# Altium PCB WEB_RAD_PWR.PcbDoc
Units mm, origin at the board's own origin, x right, y up, seen from the top; angles counter-clockwise.
Board outline 47.5 x 34 mm, 2 copper layers (Top Layer, Bottom Layer), stack 1.62 mm thick; 9 components, 6 nets, 37 pads, 28 vias.
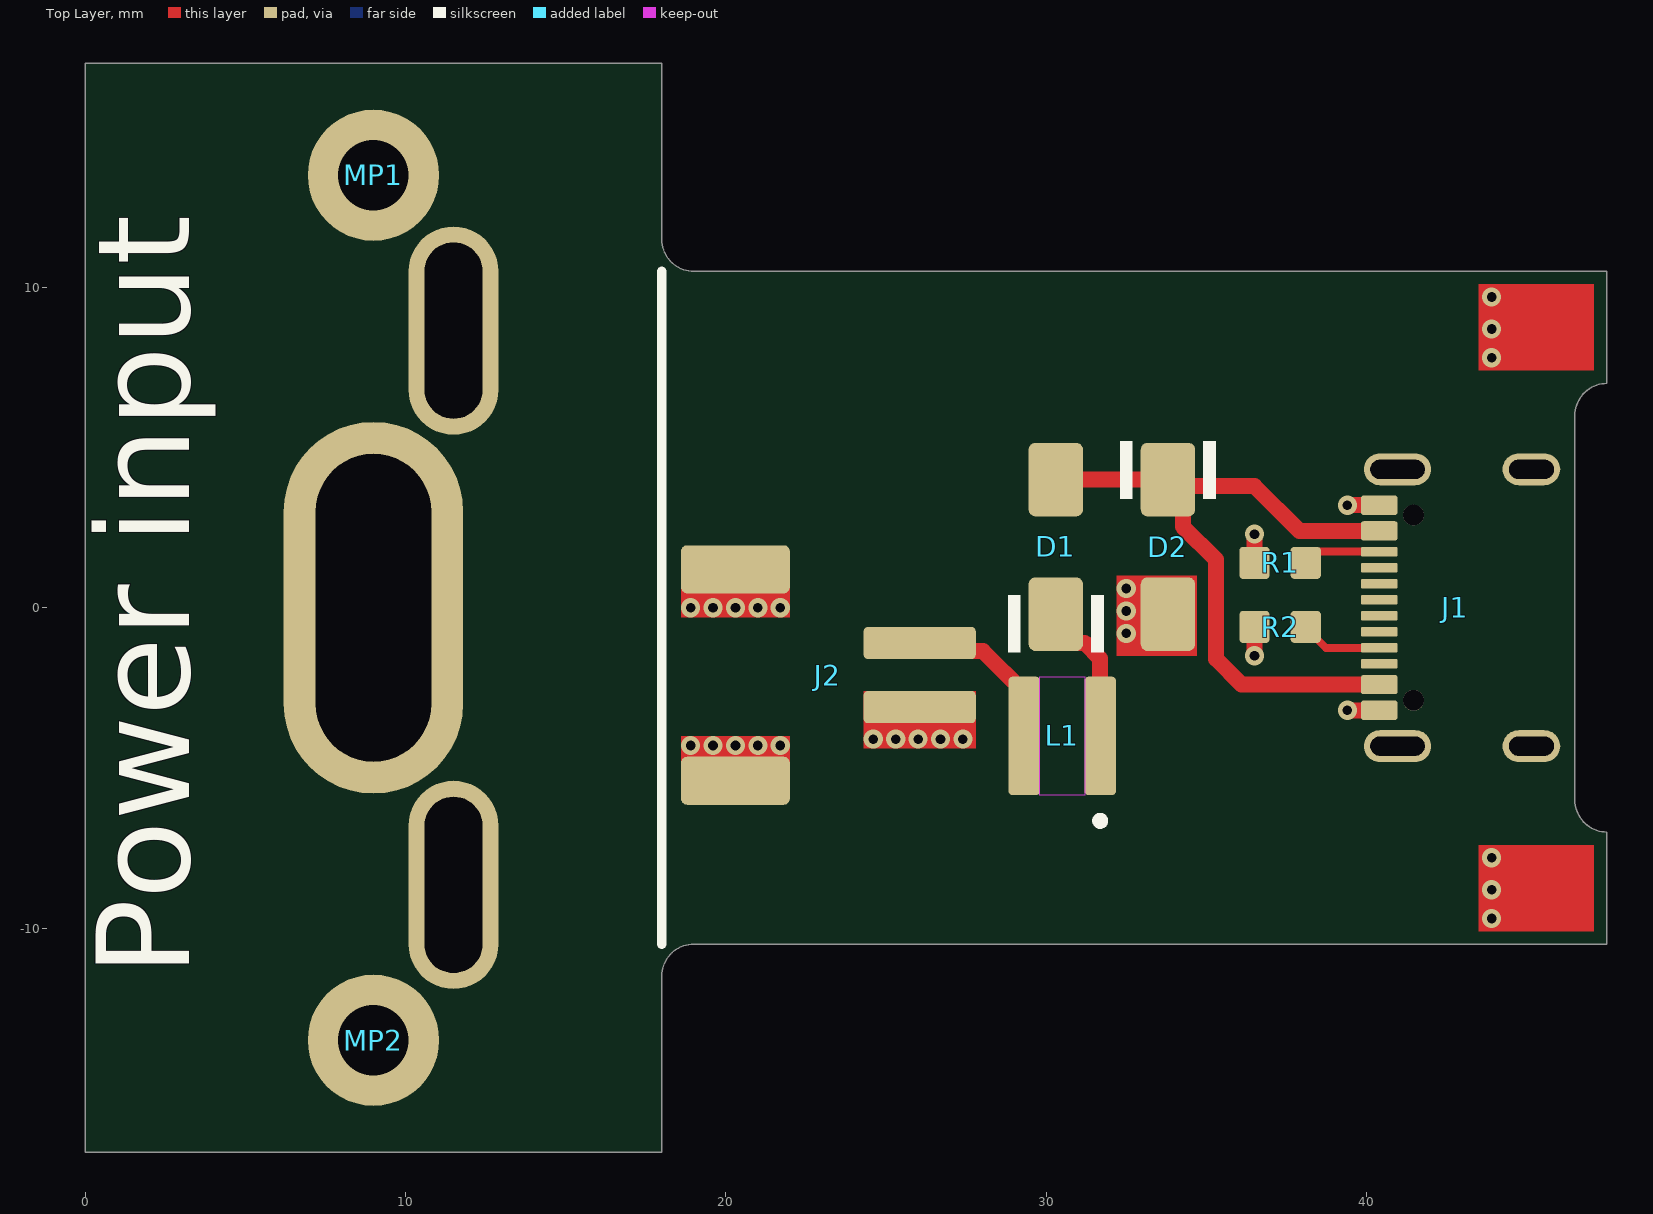
[diagram p0: Top Layer view]
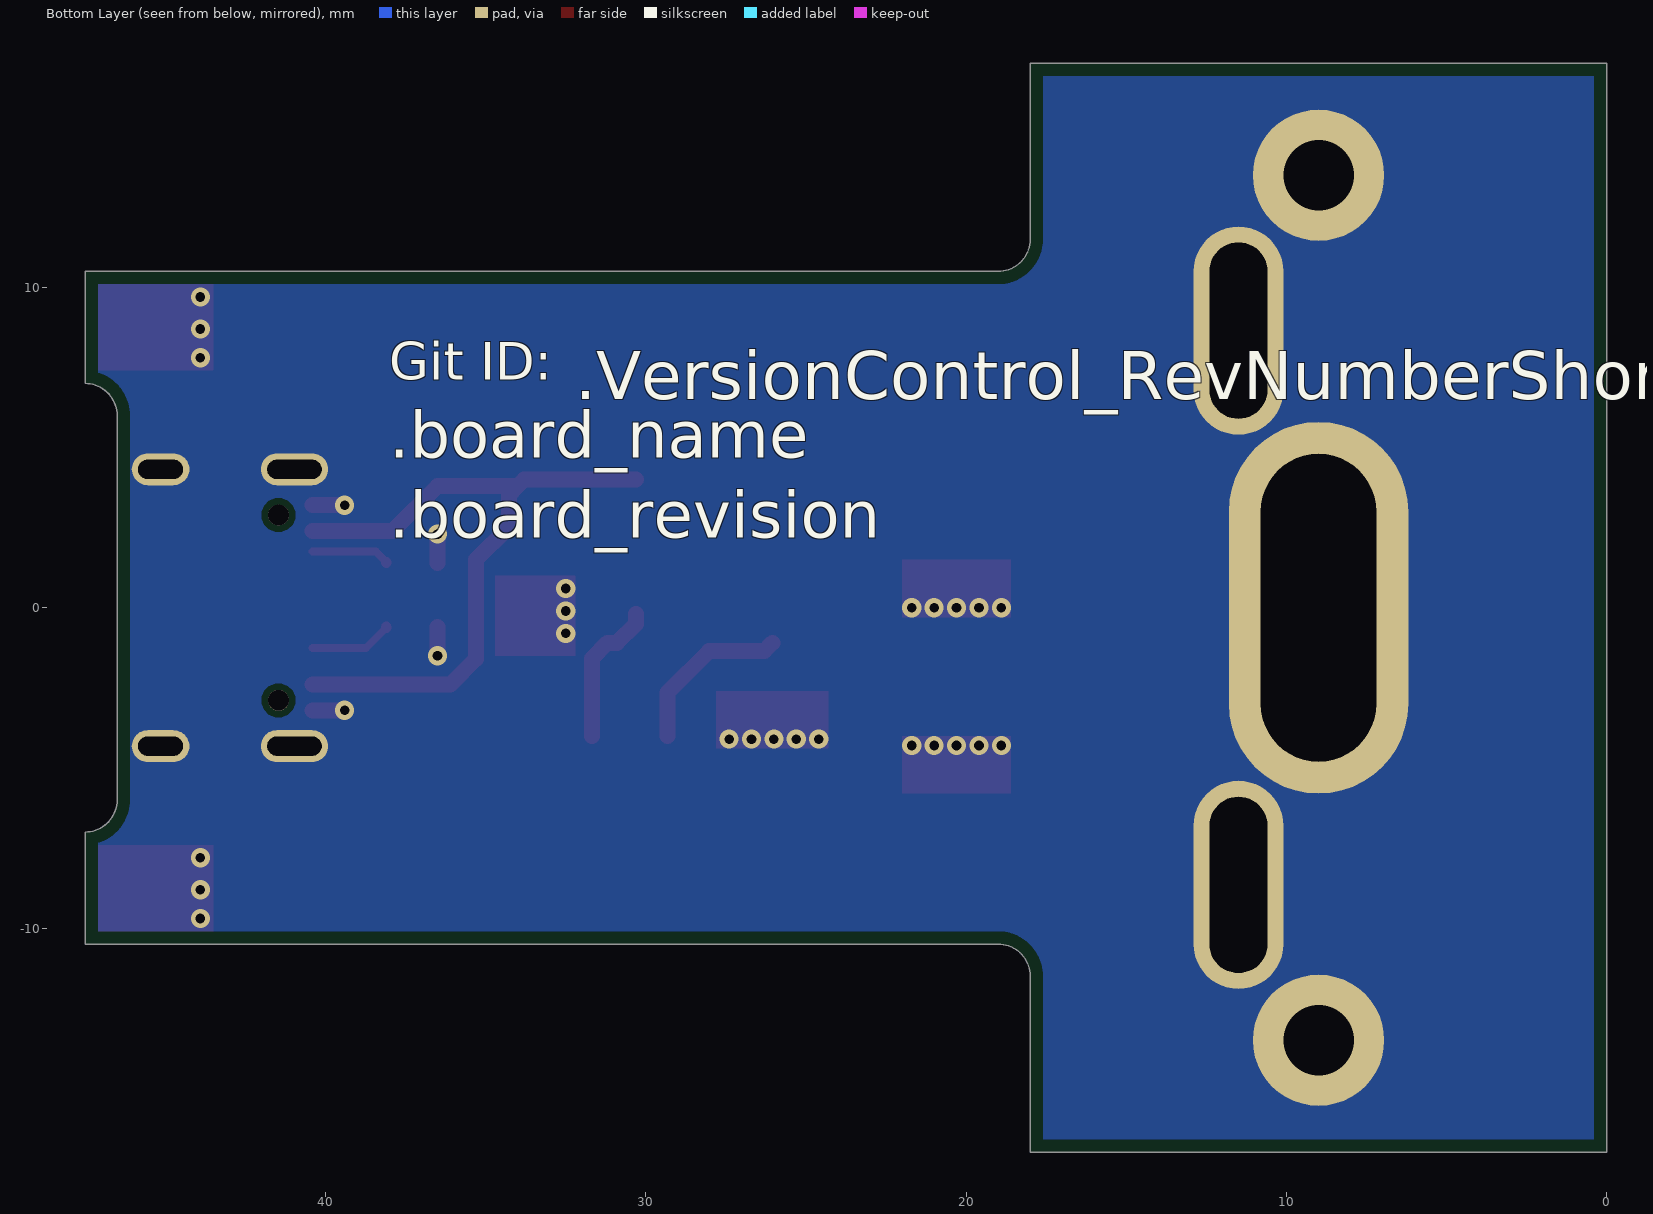
[diagram p1: Bottom Layer view, seen from below]
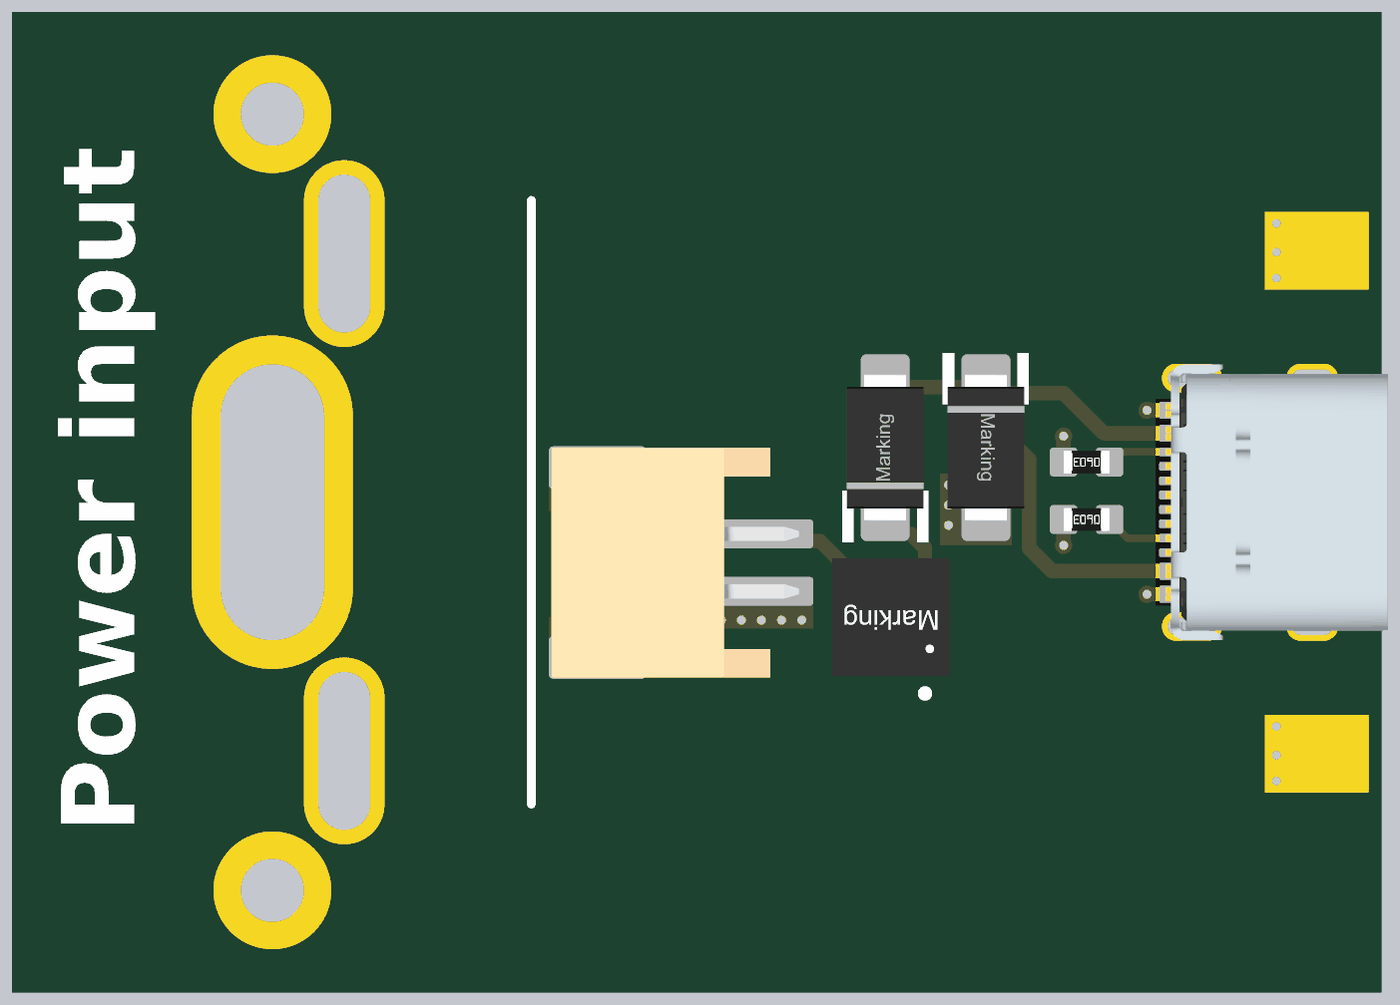
[diagram p2: 3D render of the assembled board from above, using the file's embedded part models]

## Layer stack, top to bottom
Top Solder: solder mask 0.0254, SM-001, Dk 4
Top Layer: signal copper 0.035
Dielectric 3: core 1.55, Core-042, Dk 4.6
Bottom Layer: signal copper 0.035
Bottom Solder: solder mask 0.0254, SM-001, Dk 4

## Board outline
0,-17 0,17 18,17 18,11.5 ccw(c19,11.5) 19,10.5 47.5,10.5 47.5,7 ccw(c47.5,6) 46.5,6 46.5,-6 ccw(c47.5,-6) 47.5,-7 47.5,-10.5 19,-10.5 ccw(c19,-11.5) 18,-11.5 18,-17

## Design rules (kind name [scope] priority, off if disabled: settings)
BoardOutlineClearance [IsElectrical or IsPoly] p1: gap=0.4 ignorepadtopadclearanceinfootprint=FALSE
Clearance Clearance_NTPH_to_Track [IsTrack vs IsPad and IsThruPin and not PadIsPlated] p1: gap=0.254 ignorepadtopadclearanceinfootprint=TRUE
Clearance Clearance_TH_Pad_to_TH_Pad [IsPad and IsThruPin vs IsPad and IsThruPin] p2: gap=0.5 ignorepadtopadclearanceinfootprint=TRUE
Clearance Clearance_SMT_Pad_to_SMT_Pad [IsPad and IsSMTPin vs IsPad and IsSMTPin] p3: gap=0.127 ignorepadtopadclearanceinfootprint=TRUE
Clearance [All] p4: gap=0.2 ignorepadtopadclearanceinfootprint=FALSE except(0.127: SMDPad-SMDPad)
DiffPairsRouting DiffpairThermal [InDifferentialPair('K1') or InDifferentialPair('K2')] p1: maxlimit=0.254 minlimit=0.254 mostfreqgap=0.254 toplayer_minwidth=0.381 toplayer_maxwidth=0.381 toplayer_prefwidth=0.381 bottomlayer_minwidth=0.381 bottomlayer_maxwidth=0.381 bottomlayer_prefwidth=0.381 maxuncoupledlength=12.7
DiffPairsRouting USB_ext_layer_JLCPCB_4layer_7628 [InDifferentialPair('USB')] p2: maxlimit=0.35 minlimit=0.35 mostfreqgap=0.35 toplayer_minwidth=0.33 toplayer_maxwidth=0.33 toplayer_prefwidth=0.33 bottomlayer_minwidth=0.33 bottomlayer_maxwidth=0.33 bottomlayer_prefwidth=0.33 maxuncoupledlength=12.7
Height [not HasFootprint('PEC11R-4215F-S0024') and not HasFootprint('WS-TASV_L6W6H9.5_4301x20958x6') and ontop] p1: minheight=0 maxheight=6.5 prefheight=1
HoleSize NPTH_HoleSize [IsPad And not PadIsPlated] p1: absolutevalues=TRUE maxlimit=2.7 minlimit=0.2 maxpercent=80.000 minpercent=20.000
HoleSize Pad_HoleSize [IsPad] p2: absolutevalues=TRUE maxlimit=5.5 minlimit=0.5 maxpercent=80.000 minpercent=20.000
HoleSize Via_HoleSize [IsVia] p3: absolutevalues=TRUE maxlimit=6.3 minlimit=0.2 maxpercent=80.000 minpercent=20.000
HoleToHoleClearance [All] p1: gap=0.254 allowstackedmicrovias=FALSE
MatchedLengths USB [InDifferentialPair('USB')] p1: tolerance=0.15 checknetsindiffpair=TRUE checkdiffpairvsdiffpair=FALSE checkxsignals=FALSE checkothers=FALSE
MinimumAnnularRing [All] p1: minimumring=0.13
MinimumSolderMaskSliver [All] p1: minsoldermaskwidth=0.2
PolygonConnect [All] p1: connectstyle=Direct reliefconductorwidth=0.5 reliefentries=4 polygonreliefangle="90 Angle" airgapwidth=0.254
RoutingVias [All] p1: holewidth=0.3 width=0.6 viastyle="Through Hole" minholewidth=0.2 minwidth=0.4 maxholewidth=0.711 maxwidth=1.27
SilkToSolderMaskClearance [IsPad] p1: minsilkscreentomaskgap=0.2 clearancetoexposedcopper=TRUE
SolderMaskExpansion SolderMaskExpansion_Via [IsVia] p1: expansion=0.102 istentingtop=TRUE
SolderMaskExpansion SolderMaskExpansion_notVia [not IsVia] p2: expansion=0.05 istentingtop=FALSE
Width [All] p1: maxlimit=2.54 minlimit=0.09 preferedwidth=0.25
24 further rules are at their usual default settings.

## Components (designator, comment, footprint, x,y, rotation, side; value= is the part's Value field where it differs from the comment)
D1 "B340AF-13" DO-214AC_UNI 30.3,1.9 r90 top
D2 "824500500" DO-214AC_UNI 33.8,1.9 r270 top
J1 "629722000214" 629722000214 44,0 r90 top
J2 "620102131822" 620102131822 24.3,-2.1 r270 top
L1 "78438357100" WE-MAIA_4030 30.5,-4 r180 top
MP1 "MountingHole" PTH-M2D4.1X4.1 9,13.5 r0 top locked
MP2 "MountingHole" PTH-M2D4.1X4.1 9,-13.5 r0 top locked
R1 "Resistor 5.1k +/-1% 50V 0603" 0603-R-N 37.3,1.4 r180 top value=5.1k
R2 "Resistor 5.1k +/-1% 50V 0603" 0603-R-N 37.3,-0.6 r180 top value=5.1k

## Footprints (in the part's own frame and the unit in brackets; to place one, negate y for a bottom-side part, rotate by r counter-clockwise, add the part's x,y. Pads: shape width x height; smd on the part's side, far side on the other; paste and mask are expansions set on the pad)
0603-R-N [mm]
  rrect25% 0.95x1 smd: 1(-0.8,0) 2(0.8,0)
  body extent -0.8,-0.4 0.8,0.4, height 0.47
620102131822 [mm] "2.00mm SMT Male Horizontal Shrouded Header, 2p"
  rrect25% 1x3.5 smd: 1(-1,1.75) 2(1,1.75)
  rrect25% 1.5x3.4 smd: MP1(-3.3,-4) MP2(3.3,-4)
  body extent -4,-5.6 4,3, height 5.57
629722000214 [mm] "USB TYPE C VERTICAL PLUG"
  rrect25% 0.6x1.14 smd: A4/B9(-2.4,3.605) A12/B1(3.2,3.605) B4/A9(2.4,3.605) B12/A1(-3.2,3.605)
  rrect25% 0.3x1.14 smd: A5(-1.25,3.605) A6(-0.25,3.605) A7(0.25,3.605) A8(1.25,3.605) B5(1.75,3.605) B6(0.75,3.605) B7(-0.75,3.605) B8(-1.75,3.605)
  round 0.65 hole 0.65 unplated: MH1(-2.89,2.535) MH2(2.89,2.535)
  oval 1x2.1 hole 0.6 slot 1.7 at 90 deg: S1(-4.32,3.035) S4(4.32,3.035)
  oval 1x1.8 hole 0.6 slot 1.4 at 90 deg: S2(-4.32,-1.145) S3(4.32,-1.145)
  body extent -4.79,-3.76 4.79,3.95, height 3.33
DO-214AC_UNI [mm] "SMA : 2-Leads. body 4.24x2.67mm"
  rrect25% 2.3x1.7 smd: 1(-2.1,0) 2(2.1,0)
  silkscreen extent -3.3,-1.5 -1.5,1.5, body extent -2.56,-1.33 2.56,1.34, height 2.24
PTH-M2D4.1X4.1 [mm]
  round 4.1 hole 2.2: 1(0,0)
WE-MAIA_4030 [mm] "SMD Power Inductor, 2-leads, body 4.1x4.1mm"
  rrect25% 0.98x3.7 smd: 1(-1.185,0) 2(1.185,0)
  Top Layer keep-out region: -0.695,1.85 0.695,1.85 0.695,-1.85 -0.695,-1.85
  silkscreen extent -1.31,2.53 -1.06,2.77, body extent -2.05,-2.05 2.05,2.05, height 3.1

## Part data
D1: library part CMP-004-00050-4, "Diode 40 V 3A Surface Mount SMAF", Case/Package=SMA, Forward Current=3A, Forward Voltage="500 mV @ 3 A", JLCPCB Part #=C5310924, Max Reverse Voltage (DC)=40V, Mounting Technology="Surface Mount", Packaging="Cut Tape", RoHS Compliant=Yes, Series=-
D2: library part CMP-074-000038-8, "WE-TVSP SMT Power TVS Diode, DO-214AC, 400W, 5VDC, Unidirectional", (Reverse) Breakdown Voltage=6.7V, (Reverse) Peak Pulse Current=43.5A, Clamping Voltage=9.2V, DC Operating Voltage=5V, JLCPCB Part #=C2925443, Manufacturer="Wurth Elektronik", Operating Temperature="-65 to +150degC", Power Dissipation=400W, Component Type=Standard, ComponentLink1Description=Manufacturer, ComponentLink1URL=http://www.we-online.de, ComponentLink2Description=Datasheet, ComponentLink2URL=https://www.we-online.com/catalog/datasheet/824500500.pdf, Design Item ID=824500500, Manufacturer Part Number=824500500, Mounting Technology=SMT, Packaging="Tape and Reel", Pin Count=2, Polarity=Unidirectional, Published Date="July 2020", Size=DO-214AC, Source=WE-TVSP_DO-214AC_Unidirectional.SchLib
J1: library part CMP-088-000027-8, "WR-USB 2.0 Type C, Receptacle, Horizontal, SMT", JLCPCB Part #=C2982555, Manufacturer="Wurth Elektronik", Operating Temperature Max=85°C, Operating Temperature Min=-40°C, Rated Current=5A, Working Voltage=20VAC, Application="USB 2.0", Category="Input/Output Connectors", Component Type=Standard, ComponentLink1Description="Website Link", ComponentLink1URL=https://www.we-online.com/redexpert/article/629722000214?ad, ComponentLink2Description="Datasheet Link", ComponentLink2URL=https://www.we-online.com/redexpert/spec/629722000214?ad, Design Item ID=629722000214, Gender=Receptacle, Interface Type="Type C", Manufacturer Part Number=629722000214, Match Code=WR-USB, Mount="Surface Mount", Number of Pins=16, Number of Ports=1, Orientation=Horizontal, Packaging="Tape and Reel", Pin Count=13, Source=WR-USB.SchLib
J2: library part CMP-047-000040-11, "WR-WTB SMT Male Horizontal Shrouded Header, pitch 2mm, 2p", Contact Resistance=20mOhm, JLCPCB Part #=C295747, Operating Temperature="-25 to +85degC", Rated Current=2A, Withstanding Voltage=800VAC, Working Voltage=100VAC, Component Type=Standard, ComponentLink1Description=Manufacturer, ComponentLink1URL=http://www.we-online.de, ComponentLink2Description=Datasheet, ComponentLink2URL=https://www.we-online.com/catalog/datasheet/620102131822.pdf, Design Item ID=620102131822, Gender=Male, Mounting Technology=SMT, Packaging="Tape and Reel", Part Number=620102131822, Pin Count=2, Pin Number=2, Pitch=2mm, Published Date="January 2020", Publisher="Wurth Elektronik", Source=WR-WTB_2.00mm.SchLib, Type=Horizontal
L1: library part CMP-116-000112-3, "WE-MAIA SMT Power Inductor, size 4030, 10uH, 3.05A, 110mOhm", Case/Size Code=4030, DC Resistance Max=110mOhm, Inductance=10uH, JLCPCB Part #=C167879, Manufacturer="Wurth Elektronik", Operating Temperature Max=125°C, Operating Temperature Min=-40°C, Rated Current=3.05A, Saturation Current @ 10%=3A, Saturation Current @ 30%=5.95A, Self Resonant Frequency=15MHz, Automotive=Yes, Category="Power Inductors", Component Type=Standard, ComponentLink1Description="Website Link", ComponentLink1URL=https://www.we-online.com/redexpert/article/78438357100?ad, ComponentLink2Description="Datasheet Link", ComponentLink2URL=https://www.we-online.com/redexpert/spec/78438357100?ad, Design Item ID=78438357100, Height=3.1mm, Length=4.1mm, Manufacturer Part Number=78438357100, Match Code=WE-MAIA, Mount="Surface Mount", Packaging="Tape and Reel", Pin Count=2, Source=WE-MAIA.SchLib, Width=4.1mm
MP1 MP2: library part CMP-00028-00004-12, "Mounting hole.  Add this so that mounting holes placed in your design don't automagically disappear when you import changes from the schematic.", Pins=1
R1 R2: library part CMP-009-00192-17, "Chip Resistor, Thick Film, General Purpose, 0603, 100mW, 50V, 5.1 kOhm, +/-1%", Case/Package=0603, JLCPCB Part #=C144594, Max Operating Temperature=155°C, Min Operating Temperature=-55°C, Power Rating=100mW, Resistor Type="Thick Film", Temperature Coefficient=100ppm/°C, Tolerance=1%, Voltage Rating=50V, Elements=1, Mounting Technology=SMT, Pins=2, REACH SVHC="No SVHC", Usage="General Purpose"

## Free pads (board coordinates)
  oval 5.6x11.6 hole 3.6 slot 9.6 at 90 deg: 1(9,0)
  oval 2.8x6.5 hole 1.8 slot 5.5 at 90 deg: 1(11.5,-8.65) 1(11.5,8.65)

## Via types
v1: diameter 0.6, hole 0.3, Top Layer to Bottom Layer, tented both sides, 28 vias

## Nets (pads, with @x,y where several pads share a name; then routed paths per layer and width w, separated by ;. In a path a pad name is that pad's centre, name@x,y a point inside that pad or via, vN(x,y) a via of type N, cw(c..) or ccw(c..) an arc to the next point about the centre after c; other vN are vias at no path point)
GND: D2.2 J1.A12/B1 J1.B12/A1 J1.S1 J1.S2 J1.S3 J1.S4 J2.2 J2.MP1 J2.MP2 MP1.1 MP2.1 pad.1 R1.2 R2.2 | length 3.8
  Top Layer w0.5: v1(36.5,-1.5) R2.2 ; R1.2 v1(36.5,2.3) ; v1(39.4,-3.2) J1.B12/A1 ; v1(39.4,3.2) J1.A12/B1
  other v1: 43.9,-9.7 43.9,-8.8 43.9,-7.8 18.9,-4.3 19.6,-4.3 20.3,-4.3 21,-4.3 21.7,-4.3 24.6,-4.1 25.3,-4.1 26,-4.1 26.7,-4.1 27.4,-4.1 32.5,-0.8 32.5,-0.1 18.9,0 19.6,0 20.3,0 21,0 21.7,0 32.5,0.6 43.9,7.8 43.9,8.7 43.9,9.7
NetD1_1: D1.1 L1.1 | length 4.5
  Top Layer w0.5: D1.1 30.3,-0.5 30.9,-1.1 31.2,-1.1 31.685,-1.585 L1.1
NetD1_2: D1.2 D2.1 J1.A4/B9 J1.B4/A9 | length 22.1
  Top Layer w0.5: D1.2 D2.1 D2.1@34,3.8 ; J1.A4/B9 36.1,-2.4 35.3,-1.6 35.3,1.5 34.268,2.532 34.268,3.532 D2.1@34,3.8 ; J1.B4/A9 37.9,2.4 36.5,3.8 D2.1@34,3.8
NetJ1_A5: J1.A5 R2.1 | length 2.6
  Top Layer w0.25: R2.1@38.1,-0.625 38.725,-1.25 J1.A5
  Top Layer w0.33: R2.1@38.1,-0.625 R2.1
NetJ1_B5: J1.B5 R1.1 | length 2.5
  Top Layer w0.25: R1.1@38.1,1.425 38.425,1.75 J1.B5
  Top Layer w0.33: R1.1 R1.1@38.1,1.425
NetJ2_1: J2.1 L1.2 | length 5.3
  Top Layer w0.5: J2.1 26.3,-1.35 28.025,-1.35 29.315,-2.64 L1.2
pads on no net: J1.A6 J1.A7 J1.A8 J1.B6 J1.B7 J1.B8 J1.MH1 J1.MH2

## Polygon pours and split planes (outlines as drawn)
GND on Bottom Layer "NONET_L-01_P-001" (solid, remove dead copper, pour order 0): -0.5,17.5 -0.5,-17.5 48,-17.5 48,17.5

## Other copper
Top Layer:
  rectangle net GND: 43.5,-10.1 47.1,-7.4
  rectangle net GND: 43.5,7.4 47.1,10.1
  rectangle net GND: 18.6,-0.3 22,1.5
  region net GND: 22,-4 18.6,-4 18.6,-5.8 22,-5.8
  rectangle net GND: 24.3,-4.4 27.8,-2.6
  rectangle net GND: 32.2,-1.5 34.7,1

## Silkscreen, mask and mechanical layers (free items; w line width, h text height)
Top Overlay:
  lines w0.3: 18,-10.5 18,10.5
  text "Power input" at 4.197,-11.5 h5 r90
Bottom Overlay:
  text "Git ID:" at 38,6.73 h2
  text ".VersionControl_RevNumberShort" at 32.2,6.5 h1.5
  text ".board_name" at 38,4.2 h2.5
  text ".board_revision" at 38,1.7 h2.5
Top Solder:
  rectangle: 43.5,-10.1 47.1,-7.4
  rectangle: 43.5,7.4 47.1,10.1
Bottom Solder:
  rectangle: 43.5,-10.1 47.1,-7.4
  rectangle: 43.5,7.4 47.1,10.1
Board:
  the board outline again, w0.1
Fab Notes:
  drawing of 191 lines, arcs and shapes, not listed
  text "Soldermask color : green / Silkscreen color : white / Surface finish : Pb-free HASL / Via covering : tented / Board outline clearance : +/- 0.2mm" at 88,25 h6
  text "Layer" at 89.95,8.3 h1.5
  text "Name" at 100.298,8.3 h1.5
  text "Material" at 123.641,8.3 h1.5
  text "Thickness" at 138.738,8.3 h1.5
  text "Constant" at 155.084,8.3 h1.5
  text "Board Layer Stack" at 169.43,8.3 h1.5
  text "Top Overlay" at 100.298,5.3 h1.5
  text "Top Solder" at 100.298,2.3 h1.5
  text "SM-001" at 123.641,2.3 h1.5
  text "0.025mm" at 138.738,2.3 h1.5
  text "4" at 155.084,2.3 h1.5
  text "1" at 89.95,-0.7 h1.5
  text "Top Layer" at 100.298,-0.7 h1.5
  text "CF-004" at 123.641,-0.7 h1.5
  text "0.035mm" at 138.738,-0.7 h1.5
  text "Dielectric 3" at 100.298,-3.7 h1.5
  text "Core-042" at 123.641,-3.7 h1.5
  text "1.550mm" at 138.738,-3.7 h1.5
  text "4.6" at 155.084,-3.7 h1.5
  text "2" at 89.95,-6.7 h1.5
  text "Bottom Layer" at 100.298,-6.7 h1.5
  text "CF-004" at 123.641,-6.7 h1.5
  text "0.035mm" at 138.738,-6.7 h1.5
  text "Bottom Solder" at 100.298,-9.7 h1.5
  text "SM-001" at 123.641,-9.7 h1.5
  text "0.025mm" at 138.738,-9.7 h1.5
  text "4" at 155.084,-9.7 h1.5
  text "Bottom Overlay" at 100.298,-12.7 h1.5
  text "Total board thickness:" at 89.95,-15.7 h1.5
  text "1.671mm" at 138.738,-15.7 h1.5